# Altium PCB FM_FKWM.pcbdoc
Units mm, origin at the board's own origin, x right, y up, seen from the top; angles counter-clockwise.
Board outline 60.71 x 50.24 mm, 2 copper layers (Top Layer, Bottom Layer); 13 components, 92 nets, 43 pads, 63 vias.
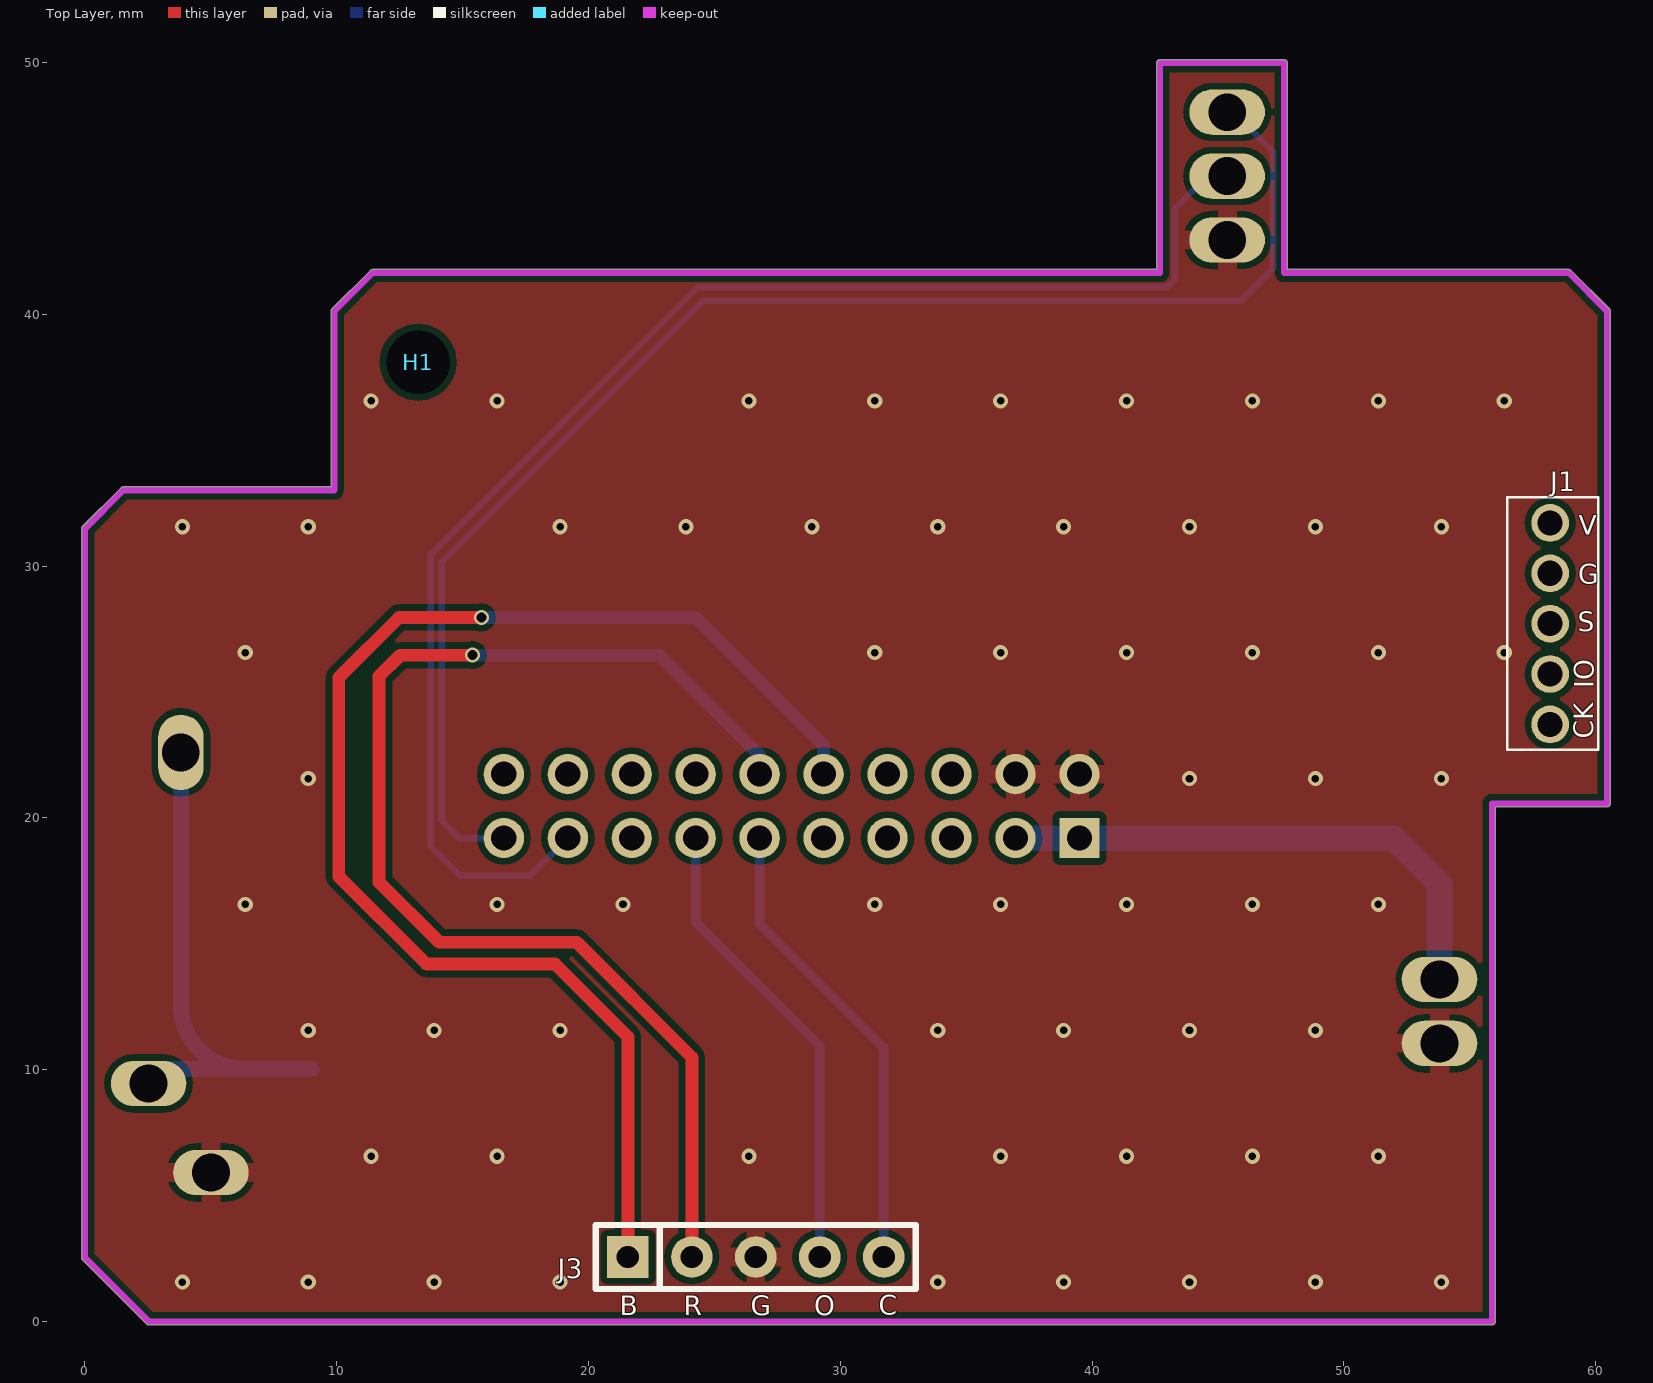
[diagram p0: Top Layer view]
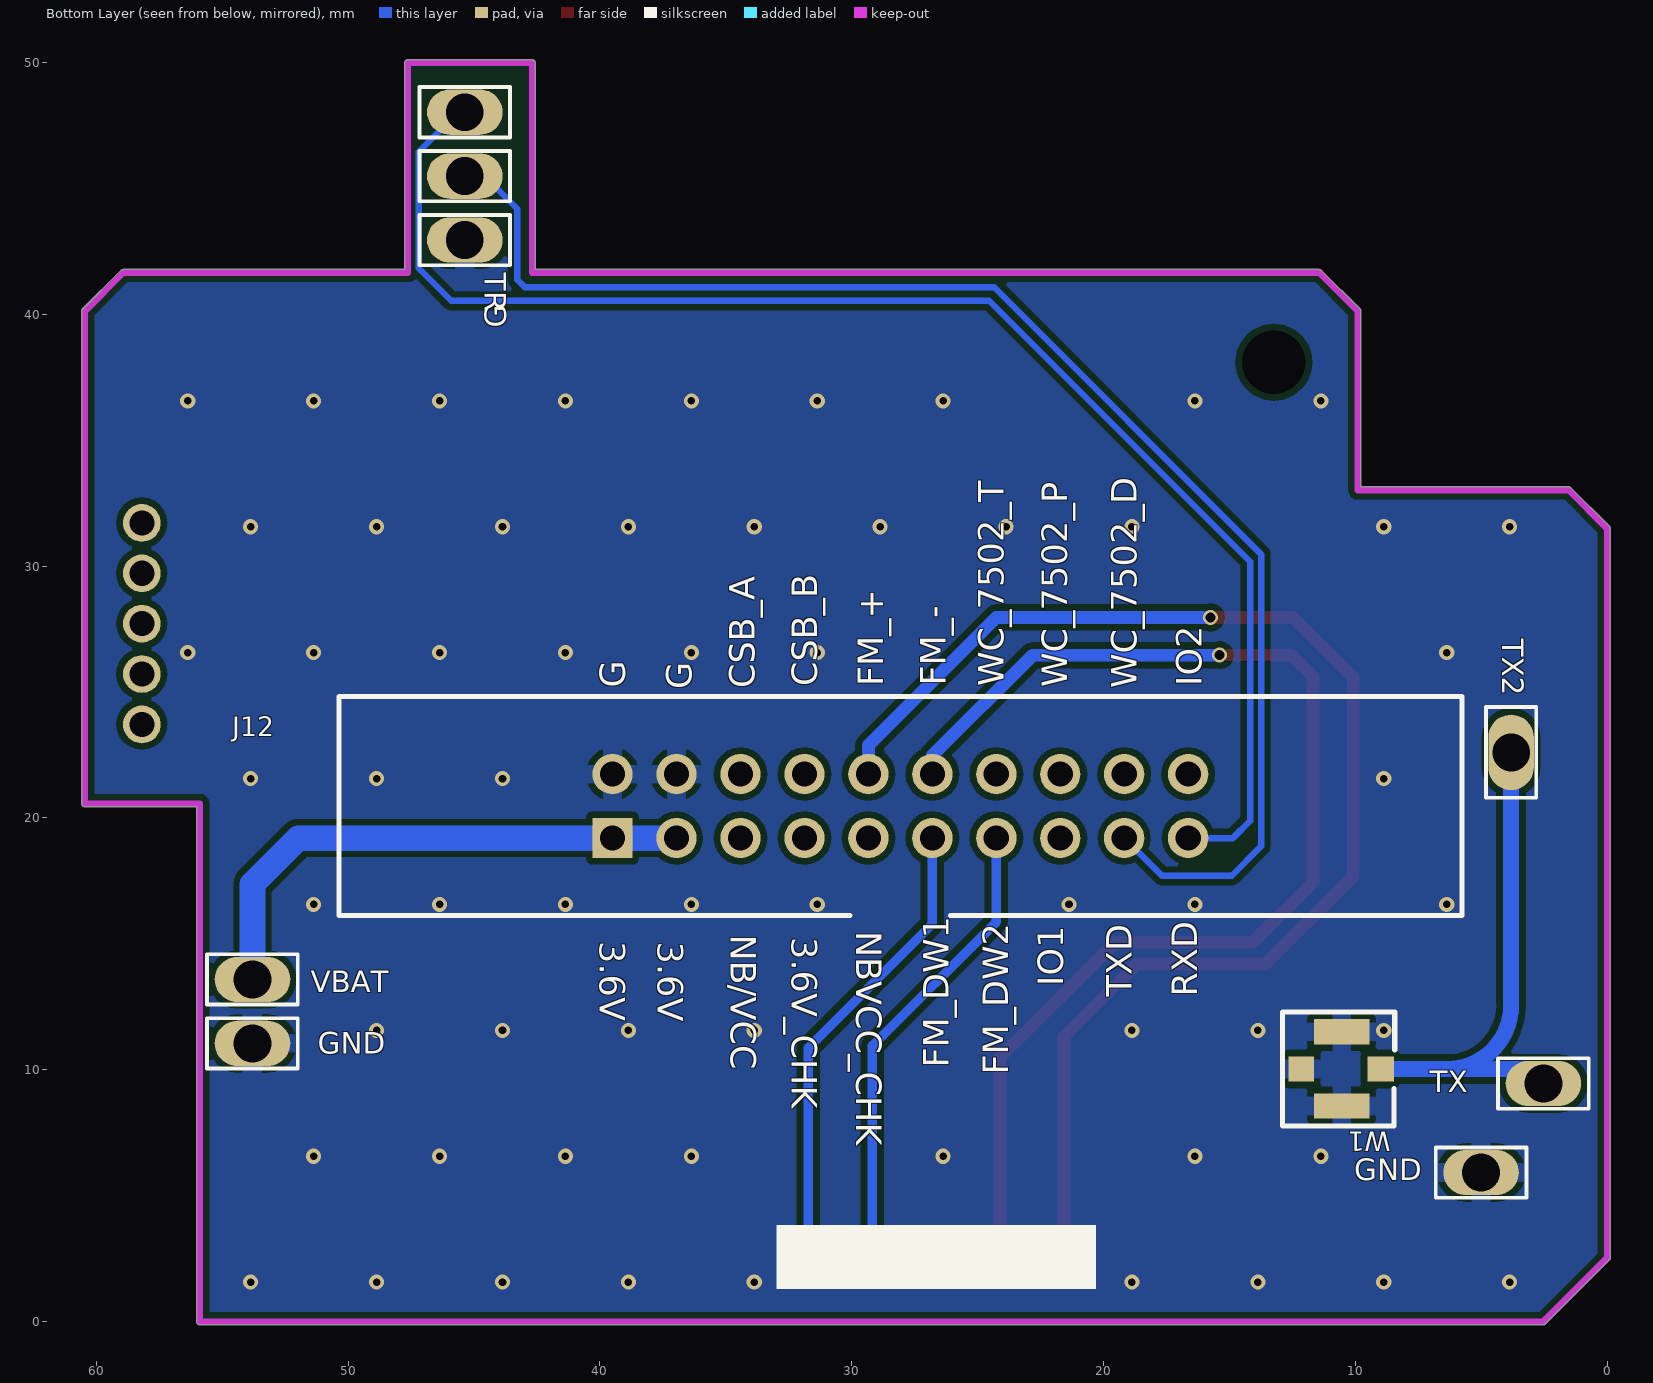
[diagram p1: Bottom Layer view, seen from below]

## Layer stack, top to bottom
Top Solder: solder mask 0.0102, Solder Resist, Dk 3.5
Top Layer: signal copper 0.0356
Dielectric1: dielectric 0.32, FR-4, Dk 4.8
Bottom Layer: signal copper 0.0356
Bottom Solder: solder mask 0.0102, Solder Resist, Dk 3.5

## Board outline
-0.09,2.449 cw(c0,2.54) -0.127,2.54 -0.127,31.496 cw(c0,31.496) -0.09,31.587 -0.09,31.586 1.434,33.11 1.433,33.11 cw(c1.524,33.02) 1.524,33.147 9.779,33.147 9.779,40.132 cw(c9.906,40.132) 9.816,40.223 9.816,40.222 11.34,41.746 11.339,41.746 cw(c11.43,41.656) 11.43,41.783 42.57,41.783 42.57,49.987 cw(c42.697,49.987) 42.697,50.115 47.625,50.115 cw(c47.625,49.987) 47.752,49.987 47.752,41.783 58.928,41.783 cw(c58.928,41.656) 59.019,41.746 59.018,41.746 60.542,40.222 60.542,40.223 cw(c60.452,40.132) 60.579,40.132 60.579,20.574 cw(c60.452,20.574) 60.452,20.447 56.007,20.447 56.007,0 cw(c55.88,0) 55.88,-0.127 2.54,-0.127 cw(c2.54,0) 2.449,-0.09 2.45,-0.09

## Design rules (kind name [scope] priority, off if disabled: settings)
Clearance Clearance_1 [inpolygon] p1: gap=0.254 ignorepadtopadclearanceinfootprint=FALSE except(0: Arc-Hole Track-Hole SMDPad-Hole THPad-Hole Via-Hole Fill-Hole Poly-Hole Region-Hole Text-Hole)
Clearance [All] p2: gap=0.178 ignorepadtopadclearanceinfootprint=FALSE except(0: Arc-Hole Track-Hole SMDPad-Hole THPad-Hole Via-Hole Fill-Hole Poly-Hole Region-Hole Text-Hole)
ComponentClearance [All] p1 off: gap=0 collisioncheckmode=3 verticalgap=0 showdistances=FALSE
FabricationTestPointUsage TestPointUsage [All] p1: valid=0 allowmultiple=FALSE
FabricationTestpoint Testpoint [All] p1: side=3 testpointundercomponent=TRUE minsize=1.016 maxsize=2.54 preferedsize=1.524 minholesize=0 maxholesize=1.016 preferedholesize=0.813 testpointgrid=0.025 allowsidetop=TRUE allowsidebottom=TRUE usegrid=TRUE gridtolerance=0
PolygonConnect [isvia] p1: connectstyle=Direct reliefconductorwidth=0.254 reliefentries=4 polygonreliefangle="90 Angle" airgapwidth=0.254
PolygonConnect PolygonConnect_1 [All] p2: connectstyle=Relief reliefconductorwidth=0.762 reliefentries=4 polygonreliefangle="90 Angle" airgapwidth=0.254
RoutingVias [All] p1: holewidth=0.406 width=0.61 viastyle="Through Hole" minholewidth=0.254 minwidth=0.457 maxholewidth=0.711 maxwidth=1.27
SilkToSilkClearance [All] p1: silktosilkclearance=0
SolderMaskExpansion [All] p1: expansion=0.102
Width [All] p1: maxlimit=1.27 minlimit=0.051 preferedwidth=0.254
26 further rules are at their usual default settings.

## Components (designator, comment, footprint, x,y, rotation, side; value= is the part's Value field where it differs from the comment)
G "Test Point" TP5 45.364,42.951 r90 bottom (schematic designator TP1)
GND "Test Point" TP5 53.797,11.049 r90 bottom (schematic designator TP1)
GND "Test Point" TP5 5.004,5.918 r270 bottom (schematic designator TP1)
H1 "" HOLE-2.5 13.233,38.1 r0 top locked
J1 "CON5-2.0" J_DIP_2.0_1*05_H 58.191,31.718 r270 top
J3 "CON5" SIP-5 21.565,2.565 r0 top
J12 "DC254_2*10" DC254_2*10 28.067,20.472 r90 bottom (schematic designator J2)
R "Test Point" TP5 45.364,45.491 r90 bottom (schematic designator TP1)
T "Test Point" TP5 45.364,48.031 r90 bottom (schematic designator TP1)
TX "Test Point" TP5 2.527,9.455 r270 bottom (schematic designator TP1)
TX2 "Test Point" TP5 3.81,22.606 r0 bottom (schematic designator TP1)
VBAT "Test Point" TP5 53.797,13.589 r90 bottom (schematic designator TP1)
W1 "天线" ANT-IPEX 8.992,10.033 r90 bottom

## Footprints (in the part's own frame and the unit in brackets; to place one, negate y for a bottom-side part, rotate by r counter-clockwise, add the part's x,y. Pads: shape width x height; smd on the part's side, far side on the other; paste and mask are expansions set on the pad)
ANT-IPEX [mm] "IPX天线座"
  rect 1x1.05 smd: 1(0,0)
  rect 1x2.2 smd: 2(-1.475,1.55) 2(1.475,1.55)
  rect 1x1 smd: 2(0,3.151)
  silkscreen extent -2.26,-0.56 2.26,3.9
DC254_2*10 [mm]
  rect 1.6x1.6 hole 1: 1(-1.27,11.43)
  round 1.6 hole 1: 2(1.27,11.43) 3(-1.27,8.89) 4(1.27,8.89) 5(-1.27,6.35) 6(1.27,6.35) 7(-1.27,3.81) 8(1.27,3.81) 9(-1.27,1.27) 10(1.27,1.27) 11(-1.27,-1.27) 12(1.27,-1.27) 13(-1.27,-3.81) 14(1.27,-3.81) 15(-1.27,-6.35) 16(1.27,-6.35) 17(-1.27,-8.89) 18(1.27,-8.89) 19(-1.27,-11.43) 20(1.27,-11.43)
  silkscreen extent -4.35,-22.3 4.35,22.3
HOLE-2.5 [mil]
  round 50 hole 99 unplated: 0(0,0)
J_DIP_2.0_1*05_H [mm]
  round 1.5 hole 1: 1(0,0) 2(2,0) 3(4,0) 4(6,0) 5(8,0)
  silkscreen extent -1.02,-1.7 9.02,1.91
SIP-5 [mil]
  rect 65x65 hole 35: 1(0,0)
  round 65 hole 35: 2(100,0) 3(200,0) 4(300,0) 5(400,0)
  silkscreen extent -50,-50 450,50
TP5 [mm]
  oval 1.8x3 hole 1.5: 1(0,0)
  silkscreen extent -1,-1.8 1,1.8

## Part data
G GND GND R T TX TX2 VBAT: library part "Test Point  PASS", "测试点"
H1: library part 22, "定位孔,孔径2.5mm,非金属化,无电气连接"
J1: library part 15, "焊接插座,间距2.0mm"
J3: library part 4, "焊接插座,间距2.54mm"
J12: library part 1010902-0139, "DC2 2.54mm 2x10pin,2.54mm间距，2x10pin，32×8.55×27.5mm,母头,双排,双排"
W1: library part 1010902-0145, "UB06000058A,3*3.1*1.25mm,公头,单排,IPEX一代板端"

## Via types
v1: diameter 0.6, hole 0.3, Top Layer to Bottom Layer, tented both sides, 61 vias
v2: diameter 0.6, hole 0.4, Top Layer to Bottom Layer, tented both sides, 2 vias

## Nets (pads, with @x,y where several pads share a name; then routed paths per layer and width w, separated by ;. In a path a pad name is that pad's centre, name@x,y a point inside that pad or via, vN(x,y) a via of type N, cw(c..) or ccw(c..) an arc to the next point about the centre after c; other vN are vias at no path point)
AIN8: 
ANT: 
CLOSE: 
CTR_F_VCC: 
DB_RXD: J12.17 R.1 | length 57.6
  Bottom Layer w0.254: J12.17 17.678,17.704 14.91,17.704 13.741,18.872 13.741,30.48 24.333,41.072 42.977,41.072 43.282,41.377 43.282,44.196 44.577,45.491 R.1
DB_TXD: J12.19 T.1 | length 58
  Bottom Layer w0.254: J12.19 14.859,19.202 14.173,19.888 14.173,30.175 24.536,40.538 45.898,40.538 47.193,41.834 47.193,46.457 45.618,48.031 T.1
DRV+: J3.1 J12.10 | length 54.2
  Top Layer w0.508: v2@15.697,27.965 12.471,27.965 10.084,25.578 10.084,17.678 13.564,14.199 18.669,14.199 21.565,11.303 J3.1
  Bottom Layer w0.508: v2(15.748,27.965) 24.257,27.965 29.337,22.885 J12.10
DRV-: J3.2 J12.12 | length 49.3
  Top Layer w0.508: v2@15.418,26.467 v2(15.392,26.467) 12.522,26.467 11.684,25.629 11.684,17.45 14.072,15.062 19.533,15.062 24.105,10.49 J3.2
  Bottom Layer w0.508: v2(15.392,26.467) 22.809,26.467 26.797,22.479 J12.12
EXTI1: 
EXTI2: 
EXTI3: 
EXTI4: 
FLASH_CLK: 
FLASH_CS: 
FLASH_MISO: 
FLASH_MOSI: 
FLASH_VCC: 
FLASH_WP: 
GND: G.1 GND.1 J3.3 J12.2 J12.4 W1.2
  other v1: 3.869,1.566 8.869,1.566 13.869,1.566 18.869,1.566 33.869,1.566 38.869,1.566 43.869,1.566 48.869,1.566 53.869,1.566 11.369,6.566 16.369,6.566 26.369,6.566 36.369,6.566 41.369,6.566 46.369,6.566 51.369,6.566 8.869,11.566 13.869,11.566 18.869,11.566 33.869,11.566 38.869,11.566 43.869,11.566 48.869,11.566 6.369,16.566 16.369,16.566 21.369,16.566 31.369,16.566 36.369,16.566 41.369,16.566 46.369,16.566 51.369,16.566 8.869,21.566 43.869,21.566 48.869,21.566 53.869,21.566 6.369,26.566 31.369,26.566 36.369,26.566 41.369,26.566 46.369,26.566 51.369,26.566 56.369,26.566 3.869,31.566 8.869,31.566 18.869,31.566 23.869,31.566 28.869,31.566 33.869,31.566 38.869,31.566 43.869,31.566 48.869,31.566 53.869,31.566 11.369,36.566 16.369,36.566 26.369,36.566 31.369,36.566 36.369,36.566 41.369,36.566 46.369,36.566 51.369,36.566 56.369,36.566
IR_EN: 
IR_TX: 
KEY: 
LED0: 
LED1: 
NB_ON: 
NB_RST: 
NB_RST_MCU: 
NB_RX: 
NB_RX_MCU: 
NB_TX: 
NB_TX_MCU: 
NetC5_2: 
NetC6_2: 
NetC7_1: 
NetC8_2: 
NetC17_1: 
NetC18_2: 
NetC23_2: 
NetC33_2: 
NetD1_2: 
NetD4_1: 
NetD4_2: 
NetD5_1: 
NetD6_2: 
NetE1_1: 
NetE2_1: TX2.1 TX.1 W1.1 | length 20.8
  Bottom Layer w0.635: TX.1 cw(c3.105,9.455) 3.105,10.033 6.35,10.033 ; TX2.1 3.81,12.573 ccw(c6.35,12.573) 6.35,10.033 ; W1.1 6.35,10.033
NetJ1_3: J1.3
NetJ3_4: J3.4 J12.13 | length 18.7
  Bottom Layer w0.381: J12.13 24.257,15.875 29.185,10.947 J3.4
NetJ3_5: J3.5 J12.11 | length 18.7
  Bottom Layer w0.381: J12.11 26.797,15.799 31.725,10.871 J3.5
NetJ5_2: 
NetJ5_3: 
NetJ5_4: 
NetQ1_1: 
NetQ2_1: 
NetQ2_3: 
NetQ3_1: 
NetQ4_1: 
NetQ4_3: 
NetQ6_3: 
NetQ7_1: 
NetQ8_1: 
NetQ9_1: 
NetQ9_3: 
NetQ10_1: 
NetQ10_3: 
NetQ11_1: 
NetQ11_3: 
NetQ12_1: 
NetQ12_3: 
NetQ13_1: 
NetR5_2: 
NetR6_2: 
NetR7_2: 
OPEN: 
OUT_A: 
OUT_B: 
OUT_EN: 
RESET: 
STATUS: 
SVS: 
SVS_EN: 
SWCLK: J1.5
SWDIO: J1.4
USIM_VDD: 
VBAT: J12.1 J12.3 VBAT.1 | length 21.4
  Bottom Layer w1.016: J12.3 J12.1 51.968,19.202 53.797,17.374 VBAT.1
VCC: J1.1
VCC-8837: 
VCC_M: 
VDD_IO: 
VDD_NB: 
XT1: 
XT2: 
pads on no net: H1.0 J1.2 J12.5 J12.6 J12.7 J12.8 J12.9 J12.14 J12.15 J12.16 J12.18 J12.20

## Polygon pours and split planes (outlines as drawn)
GND on Top Layer "Component Side-No Net" (solid, remove dead copper, pour order 1002): 0,2.54 2.515,0.025 55.88,0.025 55.88,20.523 60.35,20.523 60.452,20.625 60.452,40.132 58.953,41.631 47.65,41.631 47.625,41.656 47.625,49.987 42.697,49.987 42.697,41.656 11.43,41.656 9.906,40.132 9.906,33.045 9.881,33.02 1.524,33.02 0,31.496
GND on Bottom Layer "Component Side-No Net" (solid, remove dead copper, pour order 1004): 0,2.54 2.515,0.025 55.88,0.025 55.88,20.523 60.35,20.523 60.452,20.625 60.452,40.132 58.953,41.631 47.65,41.631 47.625,41.656 47.625,49.987 42.697,49.987 42.697,41.656 11.43,41.656 9.906,40.132 9.906,33.045 9.881,33.02 1.524,33.02 0,31.496

## Keep-outs
Keep-Out Layer:
  lines w0.254: 0,2.54 0,31.496 ; 0,2.54 2.54,0 ; 0,2.54 0,31.496 ; 0,2.54 2.54,0 ; 0,31.496 1.524,33.02 ; 0,31.496 1.524,33.02 ; 0,31.496 1.524,33.02 ; 1.524,33.02 9.906,33.02 ; 1.524,33.02 9.906,33.02 ; 1.524,33.02 9.906,33.02 ; 2.54,0 55.88,0 ; 2.54,0 55.88,0 ; 2.54,0 55.88,0 ; 9.906,33.02 9.906,40.132 ; 9.906,33.02 9.906,40.132 ; 9.906,33.02 9.906,40.132 ; 9.906,40.132 11.43,41.656 ; 9.906,40.132 11.43,41.656 ; 9.906,40.132 11.43,41.656 ; 11.43,41.656 31.242,41.656 ; 11.43,41.656 31.242,41.656 ; 11.43,41.656 31.242,41.656 ; 31.242,41.656 42.697,41.656 42.697,49.987 47.625,49.987 47.625,41.656 58.928,41.656 ; 55.88,0 55.88,20.574 ; 55.88,0 55.88,20.574 ; 55.88,0 55.88,20.574 ; 55.88,20.574 60.452,20.574 ; 55.88,20.574 60.452,20.574 ; 55.88,20.574 60.452,20.574 ; 58.928,41.656 60.452,40.132 ; 58.928,41.656 60.452,40.132 ; 58.928,41.656 60.452,40.132 ; 60.452,20.574 60.452,40.132 ; 60.452,20.574 60.452,40.132 ; 60.452,20.574 60.452,40.132

## Silkscreen, mask and mechanical layers (free items; w line width, h text height)
Top Overlay:
  text "V" at 59.334,31.242 h0.76
  text "G" at 59.309,29.312 h0.76
  text "S" at 59.284,27.407 h0.76
  text "IO" at 59.919,25.146 h0.76 r90
  text "CK" at 59.893,23.139 h0.76 r90
  text "C" at 31.521,0.279 h0.76
  text "B" at 21.234,0.254 h0.76
  text "R" at 23.774,0.254 h0.76
  text "G" at 26.441,0.254 h0.76
  text "O" at 28.956,0.254 h0.76
Bottom Overlay:
  text "FM_-" at 26.264,25.248 h1.02 r270
  text "IO2" at 16.104,25.222 h1.02 r270
  text "WC_7502_T" at 23.952,25.222 h1.02 r270
  text "FM_+" at 28.753,25.222 h1.02 r270
  text "CSB_B" at 31.369,25.222 h1.02 r270
  text "WC_7502_P" at 21.438,25.197 h1.02 r270
  text "G" at 38.989,25.171 h1.02 r270
  text "WC_7502_D" at 18.669,25.146 h1.02 r270
  text "CSB_A" at 33.858,25.146 h1.02 r270
  text "G" at 36.347,25.121 h1.02 r270
  text "NBVCC_CHK" at 29.82,15.494 h1.02 r90
  text "NB/VCC" at 34.798,15.367 h1.02 r90
  text "3.6V_CHK" at 32.385,15.265 h1.02 r90
  text "3.6V" at 40.005,15.113 h1.02 r90
  text "3.6V" at 37.694,15.088 h1.02 r90
  text "IO1" at 21.59,13.31 h1.02 r270
  text "RXD" at 16.281,12.903 h1.02 r270
  text "TXD" at 18.872,12.903 h1.02 r270
  text "FM_DW1" at 26.137,10.084 h1.02 r270
  text "FM_DW2" at 23.774,9.804 h1.02 r270